# EAGLE board untitled (EAGLE 9.6.2)
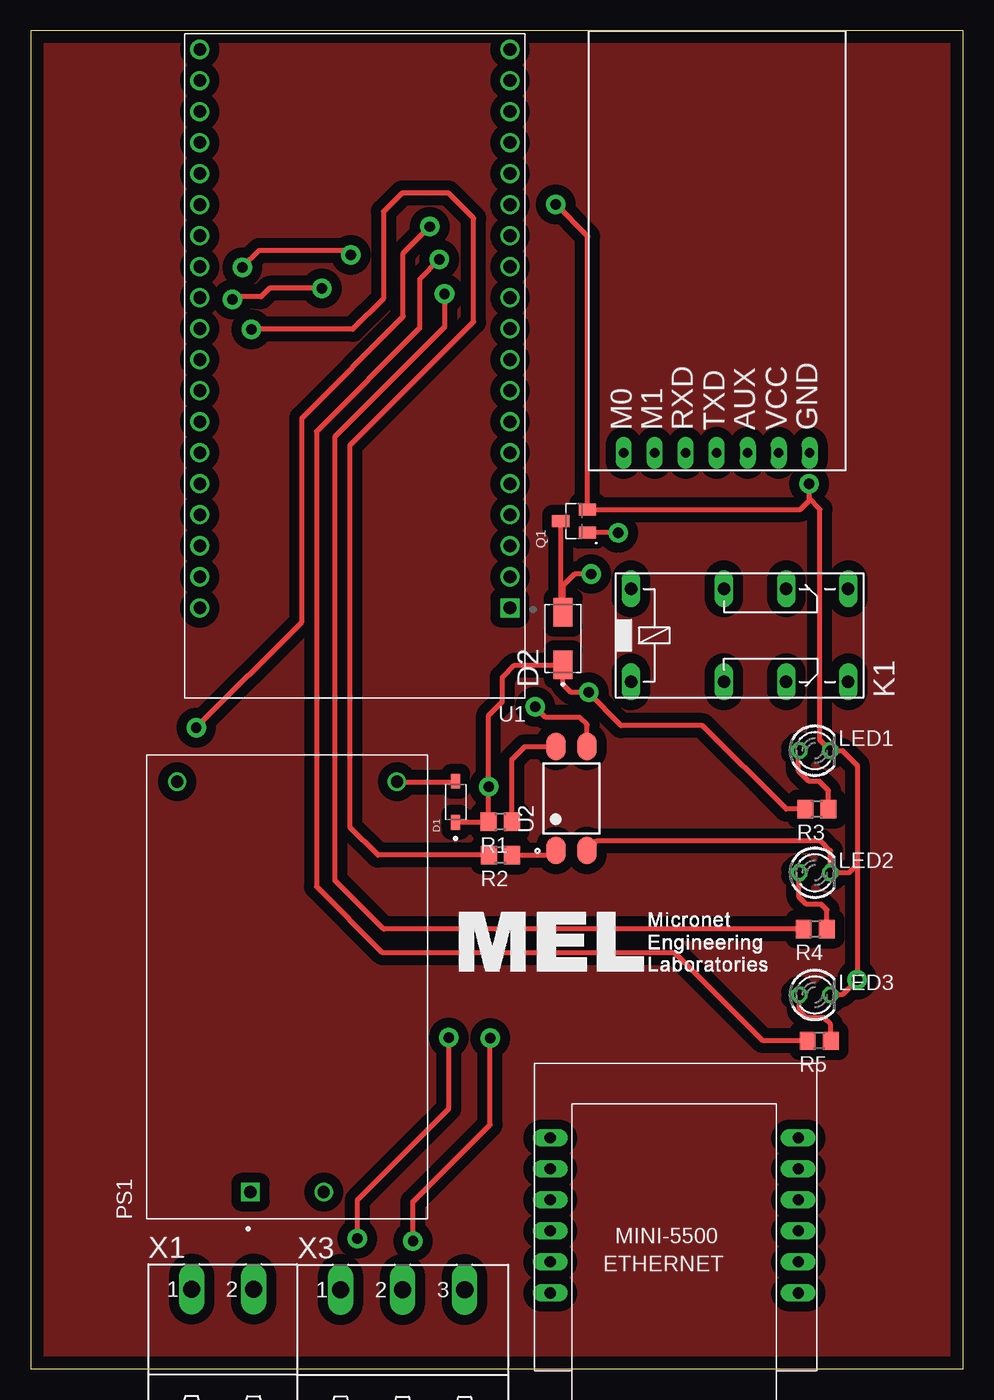
[diagram p0: board, top side]
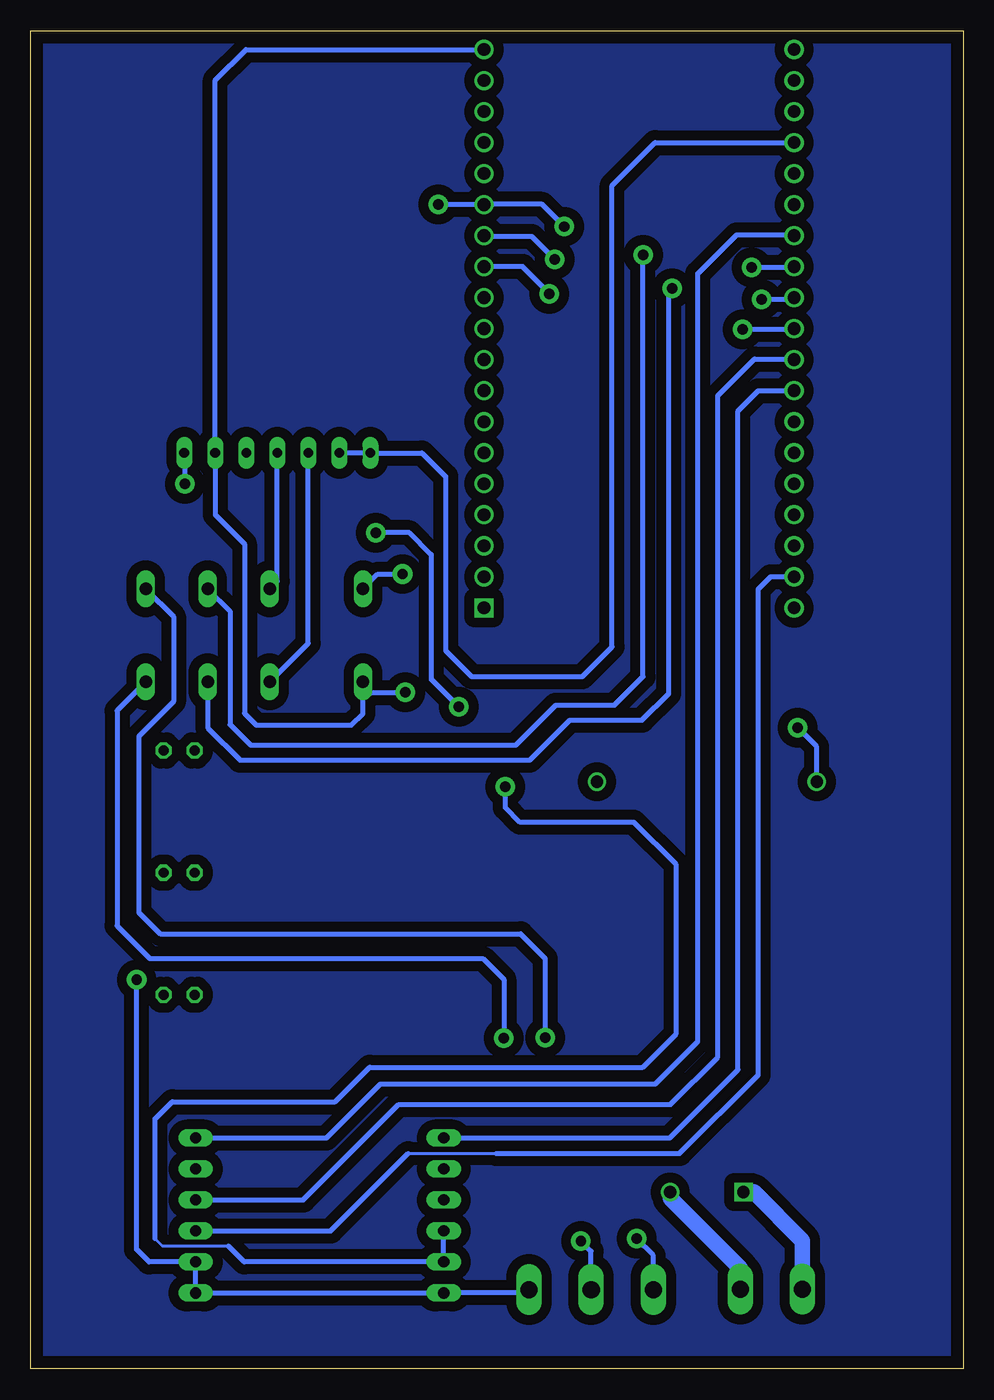
[diagram p1: board, bottom side, seen from below]

Size 76.4 x 109.6 mm. Coordinates in mm from the lower left corner, seen from the top.
Outline: 0,0 76.4,0 76.4,109.6 0,109.6 0,0
Copper layers (1*16): Top 0.035mm / dielectric 1.5mm / Bottom 0.035mm
Design rules "default": minimum track width 6mil, minimum drill 0.35mm, track to track 6mil, track to pad 6mil, pad to pad 6mil, via to via 6mil, smd to smd 6mil, copper to edge 40mil, drill to drill 6mil, minimum pad ring 10mil, minimum via ring 8mil, stop-mask expansion 4mil, vias tented up to drill 0mil, thermal gap 10mil

## Footprints (pad centres in the part's own frame; a part is rotated, then mirrored left to right if it is on the bottom)
SOD3715X145N = smd 1.21 x 0.73: A 1.68,0; C -1.68,0
DIOM5226X240N = smd 2.33 x 1.55: A 2.135,0; C -2.135,0
EBYTEE220-900T22D = drill 0.8 pad 1.27 long: AUX -4.56,-10.98; GND -4.56,-16.06; M0 -4.56,-0.82; M1 -4.56,-3.36; RXD -4.56,-5.9; TXD -4.56,-8.44; VCC -4.56,-13.52
351 = drill 1.016 long: 1 -3.81,-3.81; 16 -3.81,3.81; O1 8.89,-3.81; O2 8.89,3.81; P1 3.81,-3.81; P2 3.81,3.81; S1 13.97,-3.81; S2 13.97,3.81
LED3MM = drill 0.813 octagon: A -1.27,0; K 1.27,0
CONV_HLK-5M05 = drill 1 pad 1.5 square: 1 -16.8,3 | drill 1 pad 1.5: 2 -16.8,-3; 3 16.8,9; 4 16.8,-9
SOT95P240X120-3N = smd 1 x 1.4: 1 -0.95,-1.1; 2 0.95,-1.1; 3 0,1.1
R0805 = smd 1.3 x 1.5: 1 -0.95,0; 2 0.95,0
MODULE_ESP32-DEVKITC-32D = drill 1.04 square: 1 -12.7,19.76 | drill 1.04: 2 -12.7,17.22; 3 -12.7,14.68; 4 -12.7,12.14; 5 -12.7,9.6; 6 -12.7,7.06; 7 -12.7,4.52; 8 -12.7,1.98; 9 -12.7,-0.56; 10 -12.7,-3.1; 11 -12.7,-5.64; 12 -12.7,-8.18; 13 -12.7,-10.72; 14 -12.7,-13.26; 15 -12.7,-15.8; 16 -12.7,-18.34; 17 -12.7,-20.88; 18 -12.7,-23.42; 19 -12.7,-25.96; 20 12.7,19.76; 21 12.7,17.22; 22 12.7,14.68; 23 12.7,12.14; 24 12.7,9.6; 25 12.7,7.06; 26 12.7,4.52; 27 12.7,1.98; 28 12.7,-0.56; 29 12.7,-3.1; 30 12.7,-5.64; 31 12.7,-8.18; 32 12.7,-10.72; 33 12.7,-13.26; 34 12.7,-15.8; 35 12.7,-18.34; 36 12.7,-20.88; 37 12.7,-23.42; 38 12.7,-25.96
SOT254P975X400-4N = smd 2.25 x 1.6: 1 -4.25,1.27; 2 -4.25,-1.27; 3 4.25,-1.27; 4 4.25,1.27
MINI_W5500 = drill 0.914 long: 3V3 21.844,-8.89; 3V3.2 21.844,-11.43; CS 1.524,-16.51; GND 1.524,-6.35; GND.2 1.524,-8.89; GND.3 21.844,-6.35; INT 1.524,-19.05; MISO 21.844,-19.05; MOSI 1.524,-11.43; NC 21.844,-13.97; RST 21.844,-16.51; SCLK 1.524,-13.97
MSTBA2 = drill 1.397 long: 1 -2.54,5.08; 2 2.54,5.08
MSTBA3 = drill 1.397 long: 1 -5.08,5.08; 2 0,5.08; 3 5.08,5.08

## Placement (x,y rotation side)
D1  1N5819HW-7  [SOD3715X145N]  34.82,46.44 90 top
D2  US1M-13  [DIOM5226X240N]  43.61,59.82 90 top
EBYTEE220-900T22D1  [EBYTEE220-900T22D]  47.75,79.58 90 top
K1  351  [351]  52.99,60.07 0 top
LED1  TLLY4400  [LED3MM]  64.24,50.64 0 top
LED2  TLLY4400  [LED3MM]  64.24,40.64 0 top
LED3  TLLY4400  [LED3MM]  64.24,30.64 0 top
PS1  HLK-5M05  [CONV_HLK-5M05]  21.01,31.29 90 top
Q1  S9013  [SOT95P240X120-3N]  44.52,69.43 90 top
R1  [R0805]  38.47,44.8 180 top
R2  [R0805]  38.49,42.08 180 top
R3  [R0805]  64.39,45.84 180 top
R4  [R0805]  64.27,36.03 180 top
R5  [R0805]  64.59,26.87 180 top
U1  ESP32-DEVKITC-32D  [MODULE_ESP32-DEVKITC-32D]  26.56,82.09 180 top
U2  PC817X2NIP0F  [SOT254P975X400-4N]  44.31,46.72 90 top
U$1  MINI_W5500  [MINI_W5500]  64.4,-0.13 180 top
X1  MSTBA2  [MSTBA2]  15.73,1.46 0 top
X3  MSTBA3  [MSTBA3]  30.48,1.42 0 top

## Library data of the parts
D1 = 1N5819HW-7; AVAILABILITY: In Stock; DESCRIPTION: Diode Schottky 40 V 1A Surface Mount SOD-123; MF: Diodes Inc.; MP: 1N5819HW-7; PACKAGE: SOD-123 Fairchild Semiconductor; PRICE: None; PURCHASE-URL: https://pricing.snapeda.com/search/part/1N5819HW-7/?ref=eda
D2 = US1M-13; AVAILABILITY: In Stock; DESCRIPTION: Diode Standard 1000 V 1A Surface Mount SMA; MF: Diodes Incorporated; MP: US1M-13; PACKAGE: DO-214AC-214 Diodes Incorporated; PRICE: None; PURCHASE-URL: https://pricing.snapeda.com/search/part/US1M-13/?ref=eda
EBYTEE220-900T22D1 = EByte E220-900T22D
K1 = relay; OC_FARNELL: unknown; OC_NEWARK: unknown
LED1-LED3 = led; MF: VISHAY SEMICONDUCTOR; OC_FARNELL: 1612439
PS1 = HLK-5M05; AVAILABILITY: Not in stock; MF: Hi-link; MP: HLK-5M05; PACKAGE: Package; PRICE: None
Q1 = S9013; AVAILABILITY: In Stock; DESCRIPTION: Bipolar (BJT) Transistor NPN 20V 500mA 625mW Through Hole TO-92-3; MF: JCET; MP: S9013; PACKAGE: SOT-23-3 JCET; PRICE: None; PURCHASE-URL: https://pricing.snapeda.com/search/part/S9013/?ref=eda
R1-R5 = rcl; SPICEPREFIX: R
U1 = ESP32-DEVKITC-32D; AVAILABILITY: In Stock; DESCRIPTION: WiFi Development Tools (802.11) ESP32 General Development Kit, ESP32-WROOM-32D on the board; MF: Espressif Systems; MP: ESP32-DEVKITC-32D; PACKAGE: None; PRICE: None; PURCHASE-URL: https://pricing.snapeda.com/search/part/ESP32-DEVKITC-32D/?ref=eda
U2 = PC817X2NIP0F; AVAILABILITY: Not in stock; DESCRIPTION: Optoisolator Transistor Output 5000Vrms 1 Channel 4-SMD; MF: Sharp Microelectronics; MP: PC817X2NIP0F; PACKAGE: SMD-4 Sharp Microelectronics; PRICE: None
U$1 = ethernet-mikroavr
X1 = con-phoenix-508; MF: FARNELL; MPN: 1757242; OC_FARNELL: 3705171; OC_NEWARK: 71C4161
X3 = con-phoenix-508; MF: FARNELL; MPN: 1757255; OC_FARNELL: 3705183; OC_NEWARK: 71C4162

## Nets
3V3: U1.1
CONFIG_LORA: R2.2 U1.29
GND: EBYTEE220-900T22D1.GND LED1.K LED2.K LED3.K PS1.3 Q1.2 U1.14 U2.2 U$1.GND U$1.GND.2 U$1.GND.3 X3.3
GND2: U1.26
GND3: U1.20
INT_LAN: U1.32 U$1.INT
LED_PRS: R4.2 U1.12
LED_WRN: R5.2 U1.13
M0: EBYTEE220-900T22D1.M0 EBYTEE220-900T22D1.M1 U1.35
MISO_VSPI: U1.27 U$1.MISO
MOSI_VSPI: U1.21 U$1.MOSI
N$1: PS1.1 X1.1
N$2: PS1.2 X1.2
N$3: D1.A PS1.4
N$4: R2.1 U2.1
N$6: D2.A K1.16 Q1.3
N$7: Q1.1 U2.3
N$8: R1.1 U2.4
N$9: LED2.A R4.1
N$10: LED1.A R3.1
N$11: LED3.A R5.1
RX_LORA: EBYTEE220-900T22D1.RXD K1.P1
RXLORA_CONFIG: K1.S1 X3.2
RXLORA_MICRO: K1.O1 U1.30
SCK_VSPI: U1.28 U$1.SCLK
TX_LORA: EBYTEE220-900T22D1.TXD K1.P2
TXLORA_CONFIG: K1.S2 X3.1
TXLORA_MICRO: K1.O2 U1.31
VCC: D1.C D2.C EBYTEE220-900T22D1.VCC K1.1 R1.2 R3.2 U1.19 U$1.3V3 U$1.3V3.2

## Tracks (layer width: path | path; a pad name or v marks a point on that pad's centre or on a via)
CONFIG_LORA  (via drill 0.85 pad 1.6)
  Top 0.406: R2.2 28.44,42.08 26.16,44.36 26.16,75.64 36.29,85.76 36.29,94.22 34.22,96.29 30.43,96.29 28.91,94.77 28.91,87.66 26.38,85.13 v18.09,85.13
  Bottom 0.406: v18.09,85.13 13.92,85.13 U1.29
GND  (via drill 0.85 pad 1.6)
  Top 0.406: 67.7,41.31 67.7,49.43 66.49,50.64 LED1.K 64.66,51.48 64.66,70.41 63.78,71.3 | 67.7,41.31 67.02,40.63 LED2.K 65.5,42.43 64.7,43.23 46.34,43.23 U2.2 | 67.7,41.31 v67.7,31.88 66.47,30.64 LED3.K | v63.76,72.47 63.78,72.45 63.78,71.3 | v43.01,95.37 45.62,92.76 Q1.2 63.06,70.38 63.78,71.1 63.78,71.3 | v13.57,52.52 22.22,61.17 22.22,77.87 30.52,86.18 30.52,91.38 v32.69,93.54
  Bottom 0.406: v63.76,72.47 63.76,74.96 EBYTEE220-900T22D1.GND | v67.7,31.88 67.7,31.92 67.72,31.93 67.72,31.92 67.72,9.79 66.7,8.76 U$1.GND.2 U$1.GND U$1.GND.3 35.84,6.22 X3.3 | v43.01,95.37 39.28,95.37 | 39.28,95.37 U1.14 | PS1.3 12.01,50.96 v13.57,52.52 | v32.69,93.54 34.51,95.37 39.28,95.37
INT_LAN
  Bottom 0.406: U$1.INT 52.16,18.92 47.75,23.34 25.22,23.34 21.75,26.81 21.75,89.69 18.57,92.88 13.93,92.88 U1.32
LED_PRS  (via drill 0.85 pad 1.6)
  Top 0.406: R4.2 28.92,36.03 24.91,40.04 24.91,76.31 33.91,85.31 v33.91,88.03
  Bottom 0.406: v33.91,88.03 33.91,88.07 36.11,90.27 U1.12
LED_WRN  (via drill 0.85 pad 1.6)
  Top 0.406: R5.2 59.99,26.87 52.78,34.09 28.84,34.09 23.43,39.5 23.43,76.77 31.87,85.21 31.87,89.26 v33.48,90.86
  Bottom 0.406: U1.13 39.21,92.75 35.37,92.75 v33.48,90.86
M0
  Bottom 0.406: EBYTEE220-900T22D1.M1 EBYTEE220-900T22D1.M0 44.34,75.02 42.41,73.08 42.41,58.83 40.27,56.69 31.21,56.69 28.77,59.12 28.77,96.9 25.25,100.43 U1.35
MISO_VSPI
  Bottom 0.406: U$1.MISO 24.04,18.92 18.47,24.5 18.47,78.44 16.8,80.11 U1.27
MOSI_VSPI
  Bottom 0.254: 45.48,17.64 45.45,17.67 38.29,17.67 38.26,17.65
  Bottom 0.406: U$1.MOSI 51.82,11.3 45.48,17.64 | 38.26,17.65 23.24,17.65 16.8,24.08 16.8,63.86 15.78,64.89 13.88,64.89 U1.21
N$1
  Bottom 1.27: PS1.1 17.17,14.49 13.19,10.51 X1.1
N$2
  Bottom 1.27: PS1.2 24.01,13.98 18.27,8.24 X1.2
N$3
  Top 0.406: PS1.4 34.78,48.09 D1.A
N$4
  Top 0.406: R2.1 42.65,42.08 U2.1
N$5
  pour Bottom (isolate 0.813): -0.08,109.71 76.42,109.71 76.42,-0.29 -0.08,-0.29
N$6  (via drill 0.85 pad 1.6)
  Top 0.406: v45.93,65.09 44.55,65.09 43.61,64.16 D2.A 43.42,62.15 Q1.3
  Bottom 0.406: K1.16 47.97,65.09 v45.93,65.09
N$7  (via drill 0.85 pad 1.6)
  Top 0.406: U2.3 45.58,52.77 44.98,53.37 42.18,53.37 v41.32,54.22 | v48.14,68.48 Q1.1
  Bottom 0.406: v41.32,54.22 43.59,56.49 43.59,66.7 45.37,68.48 v48.14,68.48
N$8
  Top 0.406: R1.1 39.42,49.9 40.49,50.97 U2.4
N$9
  Top 0.406: R4.1 65.22,37.6 64.76,38.05 63.56,38.05 62.94,38.67 62.94,40.62 LED2.A
N$10
  Top 0.406: R3.1 65.34,47.37 64.61,48.11 63.75,48.11 62.89,48.97 62.89,50.56 LED1.A
N$11
  Top 0.406: R5.1 65.54,28.2 64.99,28.76 63.53,28.76 62.97,29.32 LED3.A
N$12
  pour Top (isolate 0.813): -0.08,109.71 76.42,109.71 76.42,-0.29 -0.08,-0.29
RX_LORA
  Bottom 0.406: K1.P1 53.65,59.41 EBYTEE220-900T22D1.RXD
RXLORA_CONFIG  (via drill 0.85 pad 1.6)
  Top 0.406: 31.29,10.52 v31.32,10.49 31.32,13.69 37.64,20.01 v37.64,27.08
  Bottom 0.406: K1.S1 69.32,53.9 69.32,36.3 66.64,33.62 39.34,33.62 37.64,31.91 v37.64,27.08 | X3.2 30.48,9.64 v31.32,10.49
RXLORA_MICRO  (via drill 0.85 pad 1.6)
  Top 0.406: v23.85,88.49 19.57,88.49 18.88,87.79 16.72,87.79 v16.52,87.6
  Bottom 0.406: K1.O1 61.89,52.5 59.24,49.85 35.5,49.85 32.22,53.13 26.31,53.13 24.14,55.3 24.15,55.31 24.15,88.19 v23.85,88.49 | v16.52,87.6 13.99,87.6 U1.30
SCK_VSPI
  Bottom 0.406: U$1.SCLK 54.06,13.84 46.25,21.65 23.98,21.65 20.11,25.52 20.11,79.7 17.11,82.7 13.92,82.7 U1.28
TX_LORA
  Bottom 0.406: K1.P2 56.19,64.49 EBYTEE220-900T22D1.TXD
TXLORA_CONFIG  (via drill 0.85 pad 1.6)
  Top 0.406: v34.25,27.14 34.25,21.32 26.76,13.83 v26.76,10.66
  Bottom 0.406: K1.S2 64.69,61.6 64.69,54.64 67.53,51.8 67.53,37.38 65.78,35.63 36.26,35.63 34.25,33.62 v34.25,27.14 | X3.1 25.4,9.31 v26.76,10.66
TXLORA_MICRO  (via drill 0.85 pad 1.6)
  Top 0.406: v26.23,91.23 25.87,91.59 18.73,91.59 v17.35,90.21
  Bottom 0.406: K1.O2 60.07,62.06 60.07,52.77 58.37,51.08 36.66,51.08 33.38,54.36 28.56,54.36 26.23,56.69 v26.23,91.23 | v17.35,90.21 13.92,90.21 U1.31
VCC  (via drill 0.85 pad 1.6)
  Top 0.406: 43.61,57.44 D2.C | D1.C 37.48,44.76 R1.2 v37.52,47.68 37.52,53.52 38.65,54.65 38.65,56.63 39.64,57.62 43.43,57.62 43.61,57.44 | R3.2 61.89,45.84 55.04,52.69 48.37,52.69 45.72,55.34 v45.72,55.41 44.27,55.41 43.61,56.07 43.61,57.44
  Bottom 0.254: 60.19,10.05 65.58,10.05 66.19,10.67
  Bottom 0.406: v45.72,55.41 49.02,55.41 49.19,55.57 K1.1 49.19,53.66 50.13,52.72 57.91,52.72 58.88,53.69 58.88,67.57 61.27,69.95 EBYTEE220-900T22D1.VCC 61.27,105.54 58.76,108.05 U1.19 | U$1.3V3.2 U$1.3V3 58.89,8.76 60.19,10.05 | 66.19,10.67 66.19,20.49 64.8,21.88 51.45,21.88 48.62,24.71 26.26,24.71 23.52,27.46 23.52,41.3 26.98,44.76 36.3,44.76 37.52,45.97 v37.52,47.68 37.49,47.71 37.5,47.71 v37.52,47.68